# Altium PCB PCB_SnapPixelfirmware_2026-10-07.pcbdoc
Units mm, origin at the board's own origin, x right, y up, seen from the top; angles counter-clockwise.
Board outline 105.16 x 88.9 mm, 2 copper layers (Top Layer, Bottom Layer); 8 components, 40 nets, 55 pads, 2 vias.
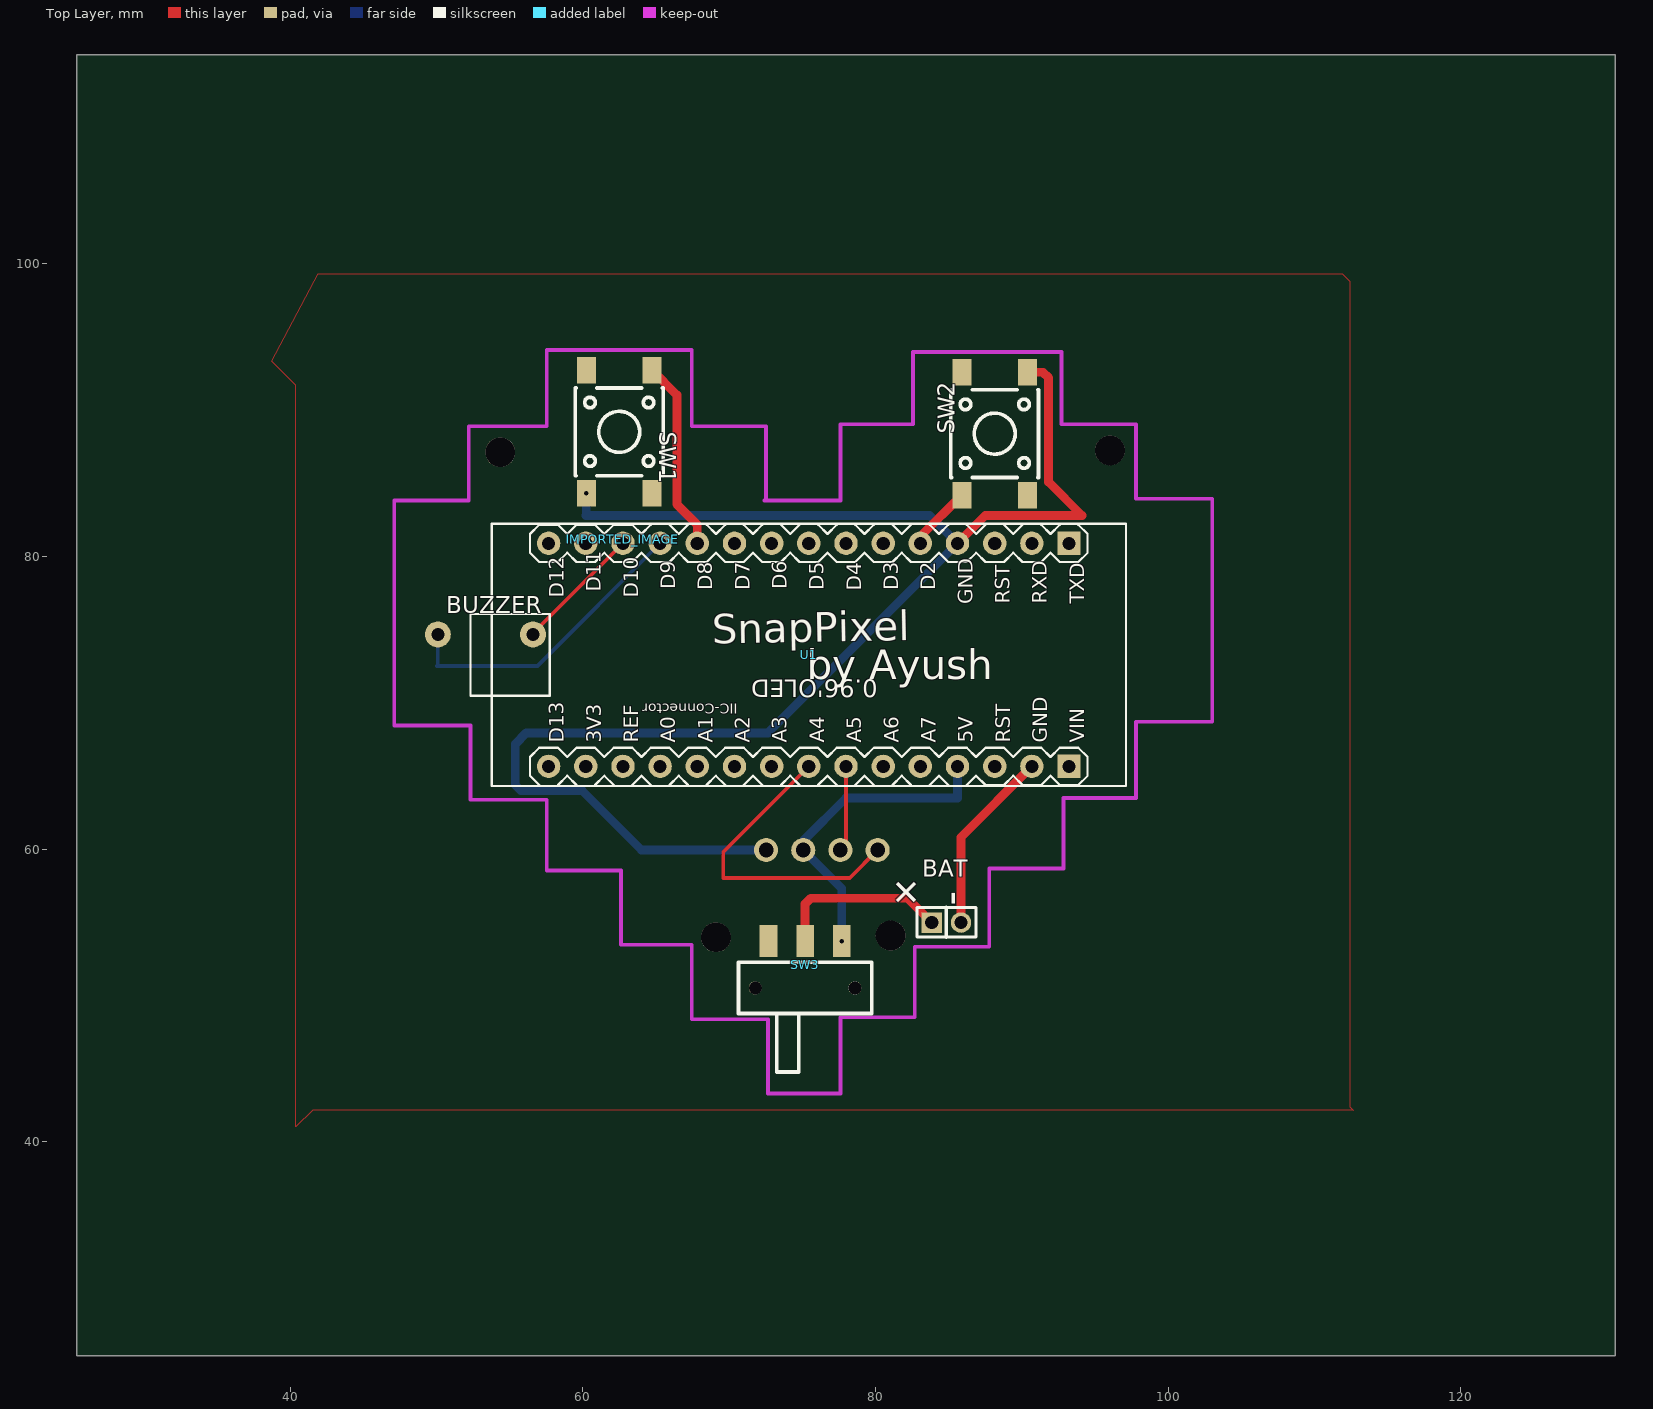
[diagram p0: Top Layer view]
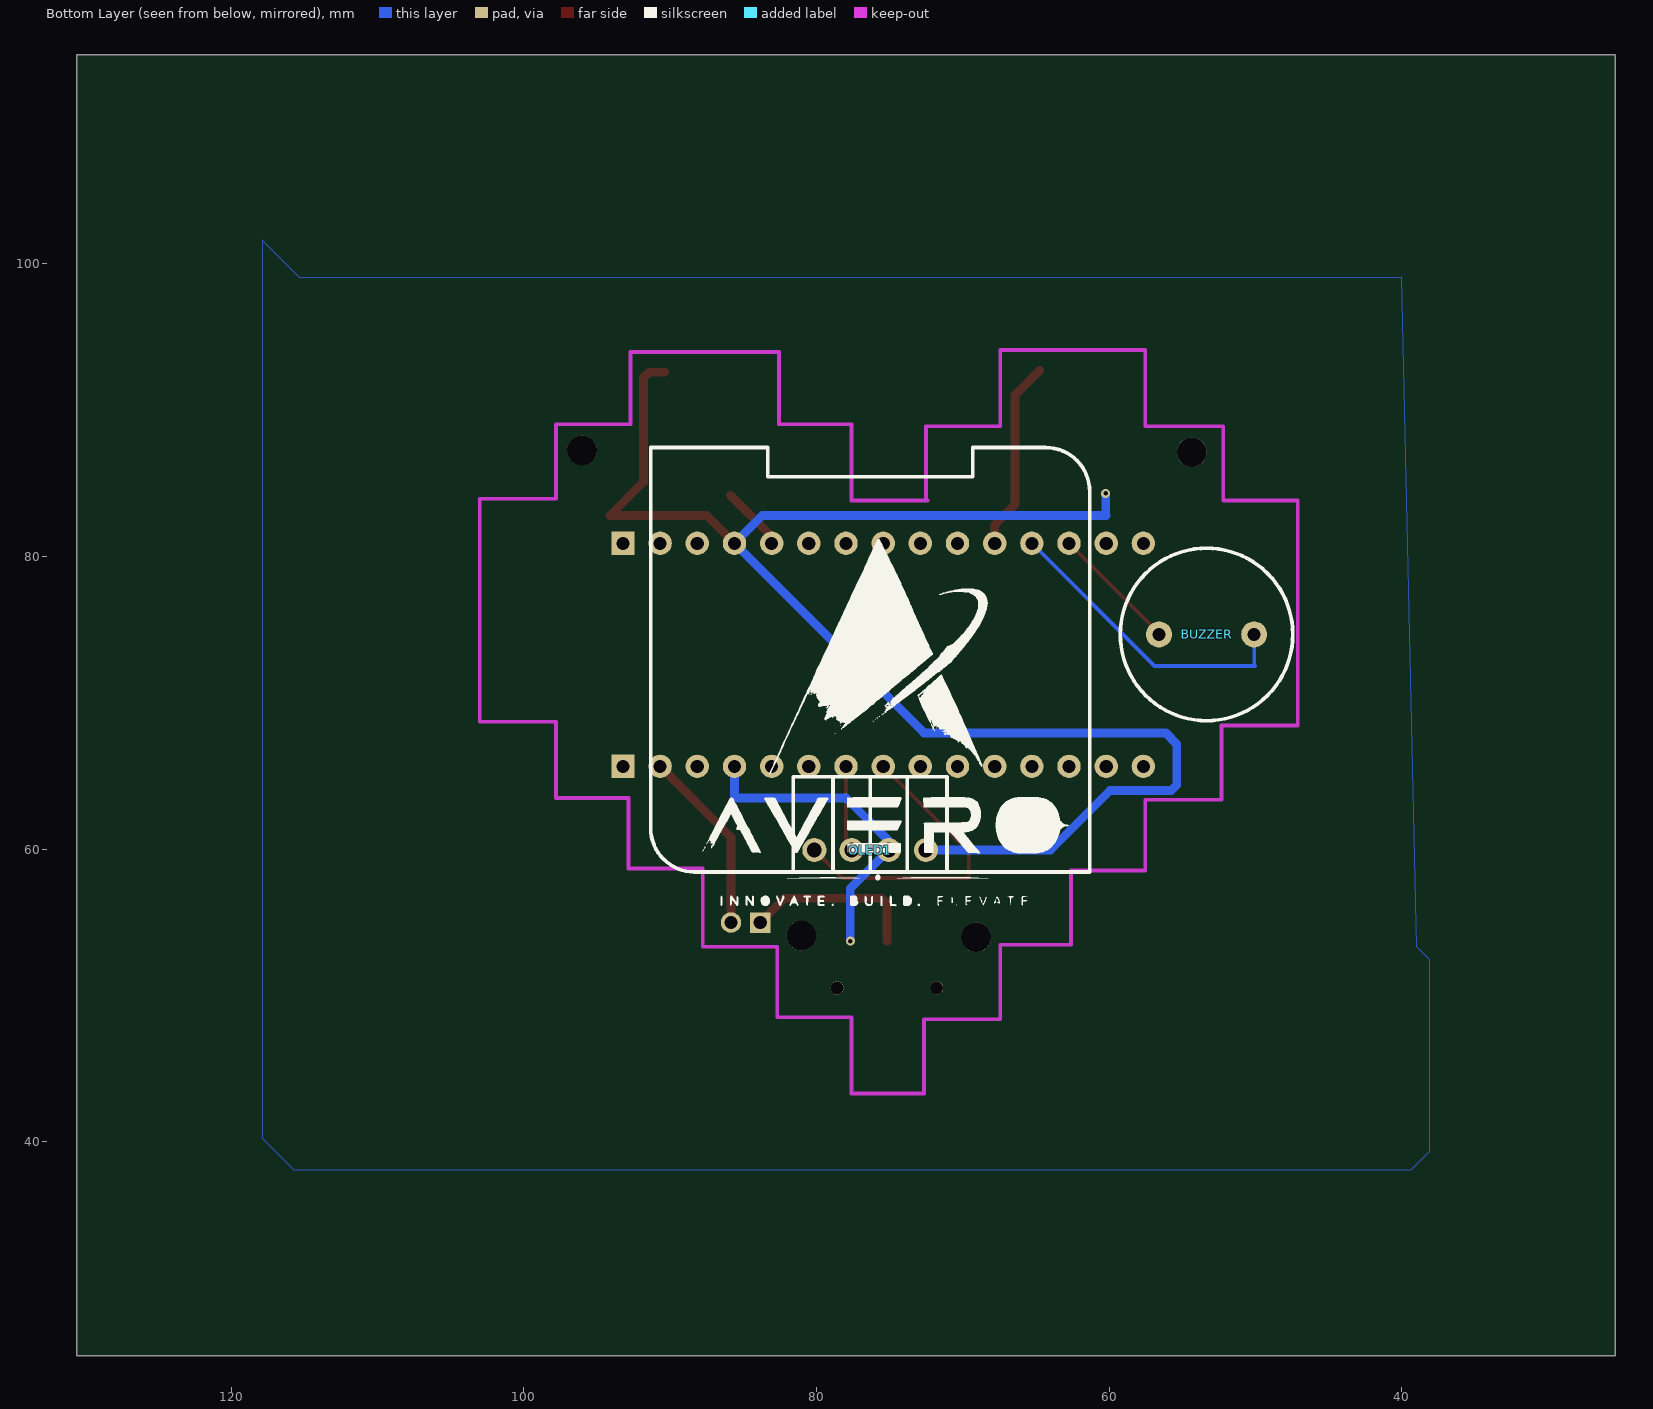
[diagram p1: Bottom Layer view, seen from below]

## Layer stack, top to bottom
Top Layer: signal copper (thickness not stored)
Dielectric: dielectric 0.32, FR-4, Dk 4.8
Bottom Layer: signal copper (thickness not stored)

## Board outline
130.556,25.4 25.4,25.4 25.4,114.3 130.556,114.3

## Components (designator, comment, footprint, x,y, rotation, side; value= is the part's Value field where it differs from the comment)
BAT "880-70-002-10-001101" HDR-TH_2P-P2.00-V-M 84.836,54.991 r0 top
BUZZER "BUZZERPTH" BUZZER-12MM 53.34,74.676 r0 bottom
IMPORTED_IMAGE "IMPORTED_IMAGE" IMPORTED_IMAGE 62.731,81.193 r0 top
OLED1 "0.96OLED_4P_MODULE_JX" 0.96OLED_4P 76.327,59.944 r180 bottom
SW1 "SW1" SW-SMD_4P-L6.0-W6.0-P4.50-LS9.2 62.484,88.519 r270 top
SW2 "SW2" SW-SMD_4P-L6.0-W6.0-P4.50-LS9.2 88.138,88.392 r90 top
SW3 "INTERRUPTOR SLIDE-SWITCH (3 PIN) COPY" SW-SMD_MST-12D18G4-SPDT-SLIDE-SWITCH 75.184,53.721 r0 top
U1 "ARDUINO_NANO" COMM-TH_ARDUINO_NANO 75.438,73.279 r0 top

## Footprints (in the part's own frame and the unit in brackets; to place one, negate y for a bottom-side part, rotate by r counter-clockwise, add the part's x,y. Pads: shape width x height; smd on the part's side, far side on the other; paste and mask are expansions set on the pad)
0.96OLED_4P [mm]
  round 1.65 hole 1 paste+0 mask+0.051: 1(3.81,0.001) 2(1.27,-0.002) 3(-1.27,-0.002) 4(-3.81,-0.002)
  silkscreen extent -15,-1.5 15,27.5
BUZZER-12MM [mil]
  round 70 hole 35.4 paste+0 mask+2: +(-128,0) -(128,0)
  silkscreen extent -232,-232 232,232
COMM-TH_ARDUINO_NANO [mm]
  rect 1.6x1.6 hole 0.9 paste+0 mask+0.051: 1(17.78,7.62) 30(17.78,-7.62)
  round 1.6 hole 0.9 paste+0 mask+0.051: 2(15.24,7.62) 3(12.7,7.62) 4(10.16,7.62) 5(7.621,7.62) 6(5.08,7.62) 7(2.541,7.62) 8(0,7.62) 9(-2.539,7.62) 10(-5.08,7.62) 11(-7.619,7.62) 12(-10.16,7.62) 13(-12.699,7.62) 14(-15.24,7.62) 15(-17.78,7.62) 16(-17.78,-7.62) 17(-15.241,-7.62) 18(-12.7,-7.62) 19(-10.161,-7.62) 20(-7.62,-7.62) 21(-5.081,-7.62) 22(-2.54,-7.62) 23(-0.001,-7.62) 24(2.54,-7.62) 25(5.079,-7.62) 26(7.62,-7.62) 27(10.159,-7.62) 28(12.7,-7.62) 29(15.24,-7.62)
  silkscreen extent -23.11,-8.97 21.67,8.97
HDR-TH_2P-P2.00-V-M [mm]
  rect 1.4x1.4 hole 0.9 paste+0 mask+0.051: 1(-1,0)
  round 1.4 hole 0.9 paste+0 mask+0.051: 2(1,0)
  silkscreen extent -1.99,-1 2.02,1.03
IMPORTED_IMAGE [mm]
SW-SMD_4P-L6.0-W6.0-P4.50-LS9.2 [mm]
  rect 1.8x1.3 smd paste+0 mask+0.051: 1(-4.2,2.25) 2(4.2,2.25) 3(-4.2,-2.25) 4(4.2,-2.25)
  silkscreen extent -3,-3 3,3
SW-SMD_MST-12D18G4-SPDT-SLIDE-SWITCH [mm]
  rect 1.2x2.2 smd paste+0 mask+0.051: 1(-2.5,0) 2(0,0) 3(2.5,0)
  round 0.9 hole 0.9 unplated paste+0: ""(-3.4,-3.2) ""(3.4,-3.2)
  silkscreen extent -4.55,-8.95 4.55,-1.45

## Free pads (board coordinates)
  round 2.032 hole 2.032 unplated paste+0: ""(54.356,87.122) ""(69.088,53.975) ""(81.026,54.102) ""(96.012,87.249)

## Via types
v1: diameter 0.62, hole 0.31, Top Layer to Bottom Layer, tented both sides, 2 vias

## Nets (pads, with @x,y where several pads share a name; then routed paths per layer and width w, separated by ;. In a path a pad name is that pad's centre, name@x,y a point inside that pad or via, vN(x,y) a via of type N, cw(c..) or ccw(c..) an arc to the next point about the centre after c; other vN are vias at no path point)
GND: 
S$1965: 
S$1969: 
S$1973: 
SW1_1: SW1.1 U1.11 | length 13.1
  Top Layer w0.6: SW1.1@64.734,92.719 66.421,91.032 66.421,83.566 67.818,82.169 U1.11
SW1_2: SW1.2
SW1_3: SW1.3
SW1_4: OLED1.1 SW1.4 SW2.4 U1.4 | length 106.6
  Top Layer w0.6: U1.4 87.503,82.804 94.107,82.804 91.821,85.09 91.821,92.202 91.43,92.591 SW2.4
  Bottom Layer w0.6: v1(60.234,84.319) 60.234,82.84 60.198,82.804 83.693,82.804 U1.4 72.644,67.945 56.134,67.945 55.372,67.183 55.372,64.389 55.753,64.008 59.944,64.008 64.007,59.945 OLED1.1
SW2_1: SW2.1 U1.5 | length 4.5
  Top Layer w0.6: U1.5 83.058,81.362 SW2.1@85.888,84.192
SW2_2: SW2.2
SW2_3: SW2.3
SW3_1: SW3.1
SW3_2: BAT.1 SW3.2 | length 12
  Top Layer w0.6: SW3.2 75.184,56.261 75.565,56.642 82.185,56.642 BAT.1
U1_1: U1.1
U1_2: U1.2
U1_3: U1.3
U1_6: U1.6
U1_7: U1.7
U1_8: U1.8
U1_9: U1.9
U1_10: U1.10
U1_12: BUZZER.+ U1.12 | length 20.9
  Bottom Layer w0.254: BUZZER.+ 50.089,72.568 50.038,72.517 56.896,72.517 U1.12
U1_13: BUZZER.- U1.13 | length 8.8
  Top Layer w0.254: BUZZER.- 56.591,74.752 U1.13
U1_14: U1.14
U1_15: U1.15
U1_16: U1.16
U1_17: U1.17
U1_18: U1.18
U1_19: U1.19
U1_20: U1.20
U1_21: U1.21
U1_22: U1.22
U1_23: OLED1.4 U1.23 | length 21.4
  Top Layer w0.254: U1.23 69.596,59.817 69.596,58.039 78.233,58.039 OLED1.4@80.137,59.943
U1_24: OLED1.3 U1.24 | length 5.9
  Top Layer w0.254: OLED1.3@77.597,59.943 77.978,60.324 U1.24
U1_25: U1.25
U1_26: U1.26
U1_27: OLED1.2 SW3.3 U1.27 | length 21.9
  Bottom Layer w0.6: v1(77.684,53.721) 77.684,57.316 75.057,59.943 75.057,60.579 77.978,63.5 85.598,63.5 U1.27
U1_28: U1.28
U1_29: BAT.2 U1.29 | length 12.7
  Top Layer w0.6: BAT.2 85.836,60.817 U1.29
U1_30: U1.30
pads on no net: SW3.

## Polygon pours and split planes (outlines as drawn)
GND on Bottom Layer (solid): 40.005,99.06 115.316,99.06 117.856,101.6 117.856,40.259 115.697,38.1 39.37,38.1 38.1,39.37 38.1,52.451 38.989,53.34
GND on Top Layer (solid): 41.91,99.314 111.887,99.314 112.395,98.806 112.395,42.418 112.649,42.164 41.529,42.164 40.386,41.021 40.386,91.694 38.735,93.345

## Silkscreen, mask and mechanical layers (free items; w line width, h text height)
Top Overlay:
  text "SnapPixel" at 68.852,74.041 h2.03 r1
  text "by Ayush" at 75.311,71.628 h2.03
  text "+" at 83.522,56.852 h2.03 r135
  text "-" at 86.106,56.134 h2.03 r90

## Text inside footprints (layer, text, board x,y; h text height)
OLED1: Top Overlay "IIC-Connector" at 70.571,70.191 h1.2 r180; Top Overlay "0.96'OLED" at 80.137,71.593 h1.2 r180
U1: Top Overlay "D13" at 58.706,67.289 h1 r90; Top Overlay "3V3" at 61.246,67.289 h1 r90; Top Overlay "REF" at 63.786,67.289 h1 r90; Top Overlay "A0" at 66.326,67.289 h1 r90; Top Overlay "A1" at 68.866,67.289 h1 r90; Top Overlay "A2" at 71.406,67.289 h1 r90; Top Overlay "A3" at 73.946,67.289 h1 r90; Top Overlay "A4" at 76.486,67.289 h1 r90; Top Overlay "A5" at 79.026,67.289 h1 r90; Top Overlay "A6" at 81.566,67.289 h1 r90; Top Overlay "A7" at 84.106,67.289 h1 r90; Top Overlay "5V" at 86.646,67.289 h1 r90; Top Overlay "RST" at 89.186,67.289 h1 r90; Top Overlay "GND" at 91.726,67.289 h1 r90; Top Overlay "VIN" at 94.266,67.289 h1 r90; Top Overlay "D12" at 58.686,77.178 h1 r90; Top Overlay "D11" at 61.226,77.587 h1 r90; Top Overlay "D10" at 63.766,77.178 h1 r90; Top Overlay "D9" at 66.306,77.752 h1 r90; Top Overlay "D8" at 68.846,77.706 h1 r90; Top Overlay "D7" at 71.386,77.706 h1 r90; Top Overlay "D6" at 73.926,77.752 h1 r90; Top Overlay "D5" at 76.466,77.706 h1 r90; Top Overlay "D4" at 79.006,77.66 h1 r90; Top Overlay "D3" at 81.546,77.706 h1 r90; Top Overlay "D2" at 84.086,77.706 h1 r90; Top Overlay "GND" at 86.626,76.723 h1 r90; Top Overlay "RST" at 89.166,76.769 h1 r90; Top Overlay "RXD" at 91.706,76.769 h1 r90; Top Overlay "TXD" at 94.246,76.769 h1 r90